# Altium PCB PCB1.PcbDoc
Units mil, origin at the board's own origin, x right, y up, seen from the top; angles counter-clockwise.
Board outline 3905 x 4010 mil, 2 copper layers (Top Layer, Bottom Layer); 16 components, 16 nets, 37 pads, 2 vias.
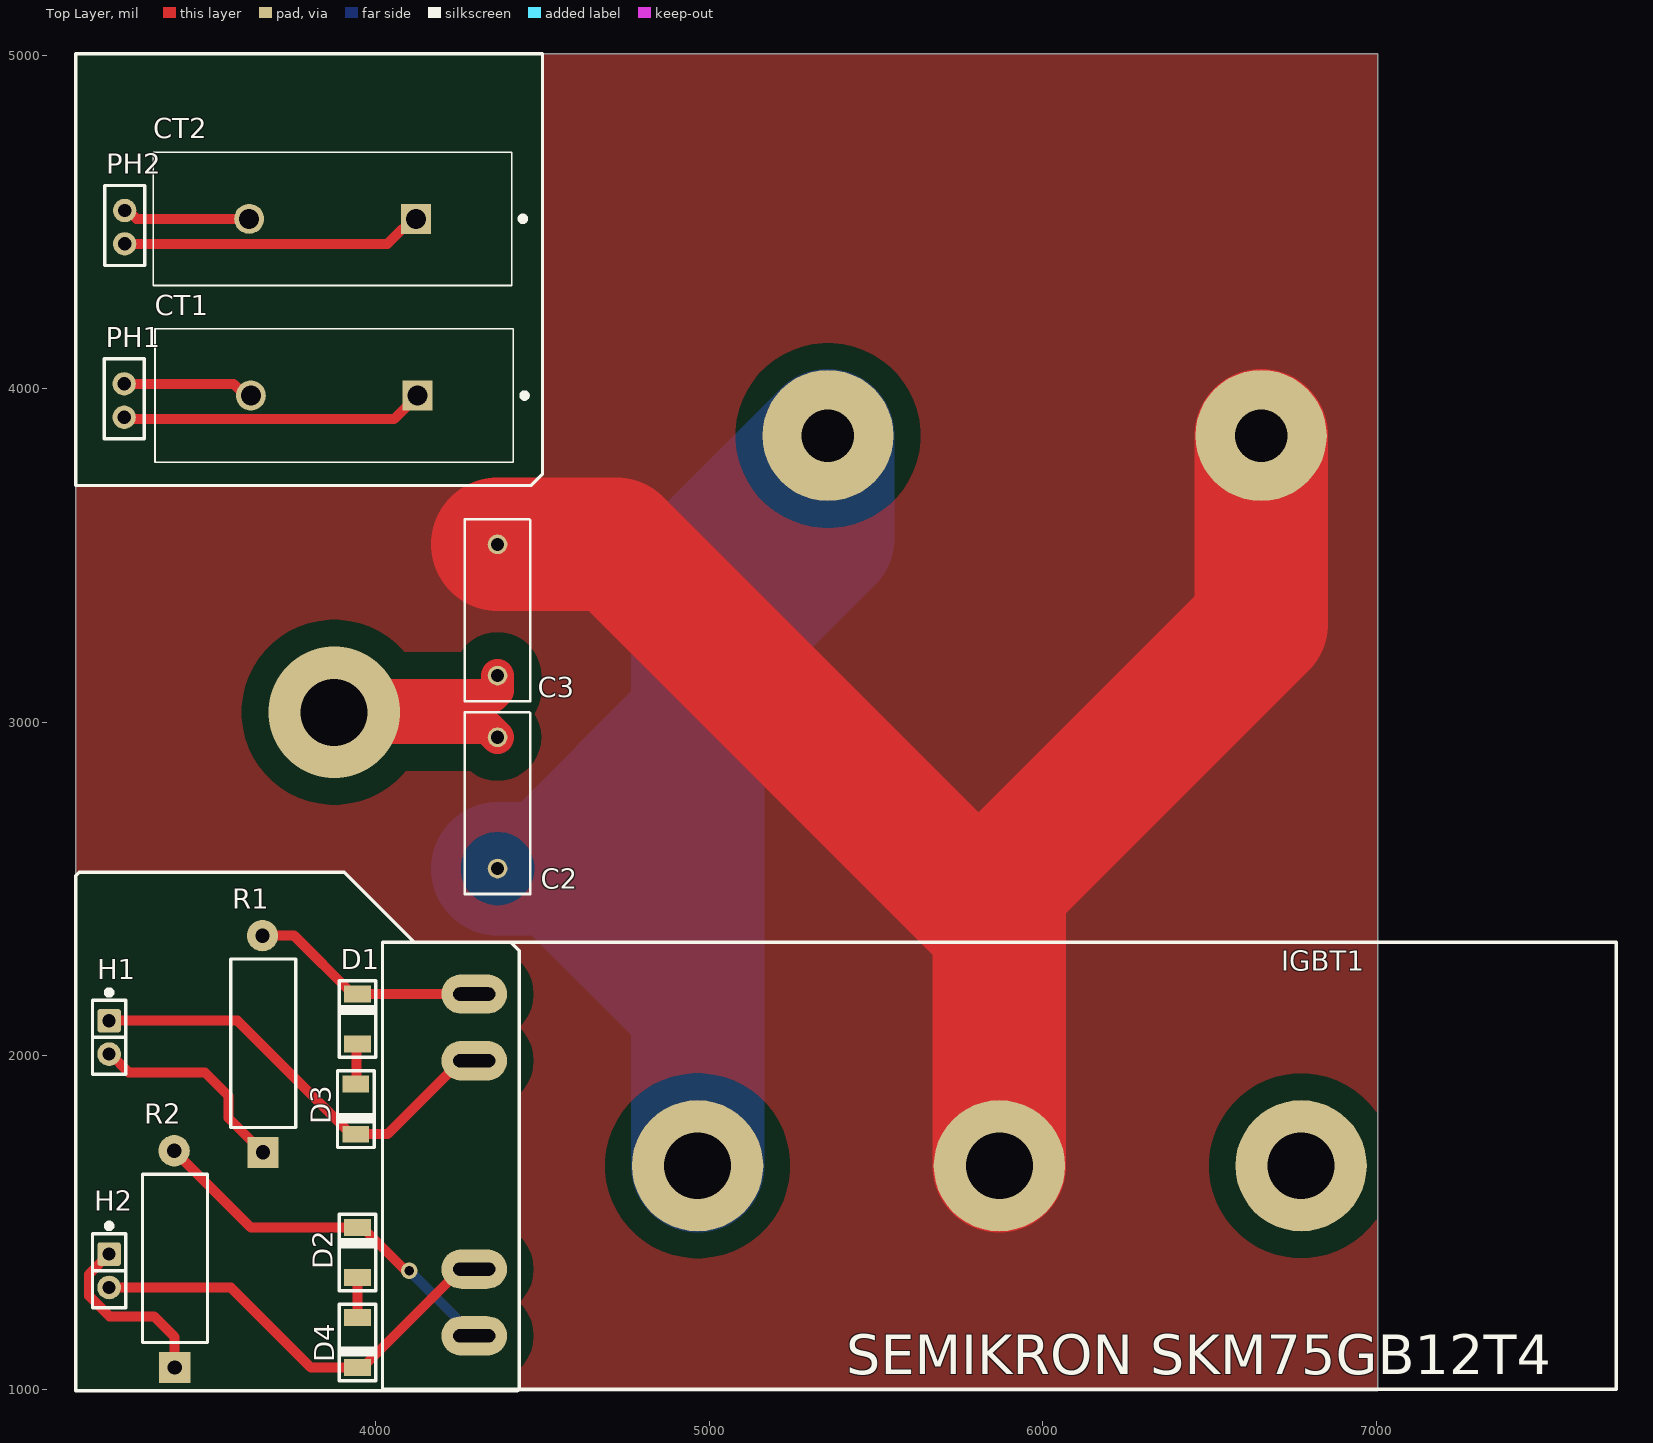
[diagram p0: Top Layer view]
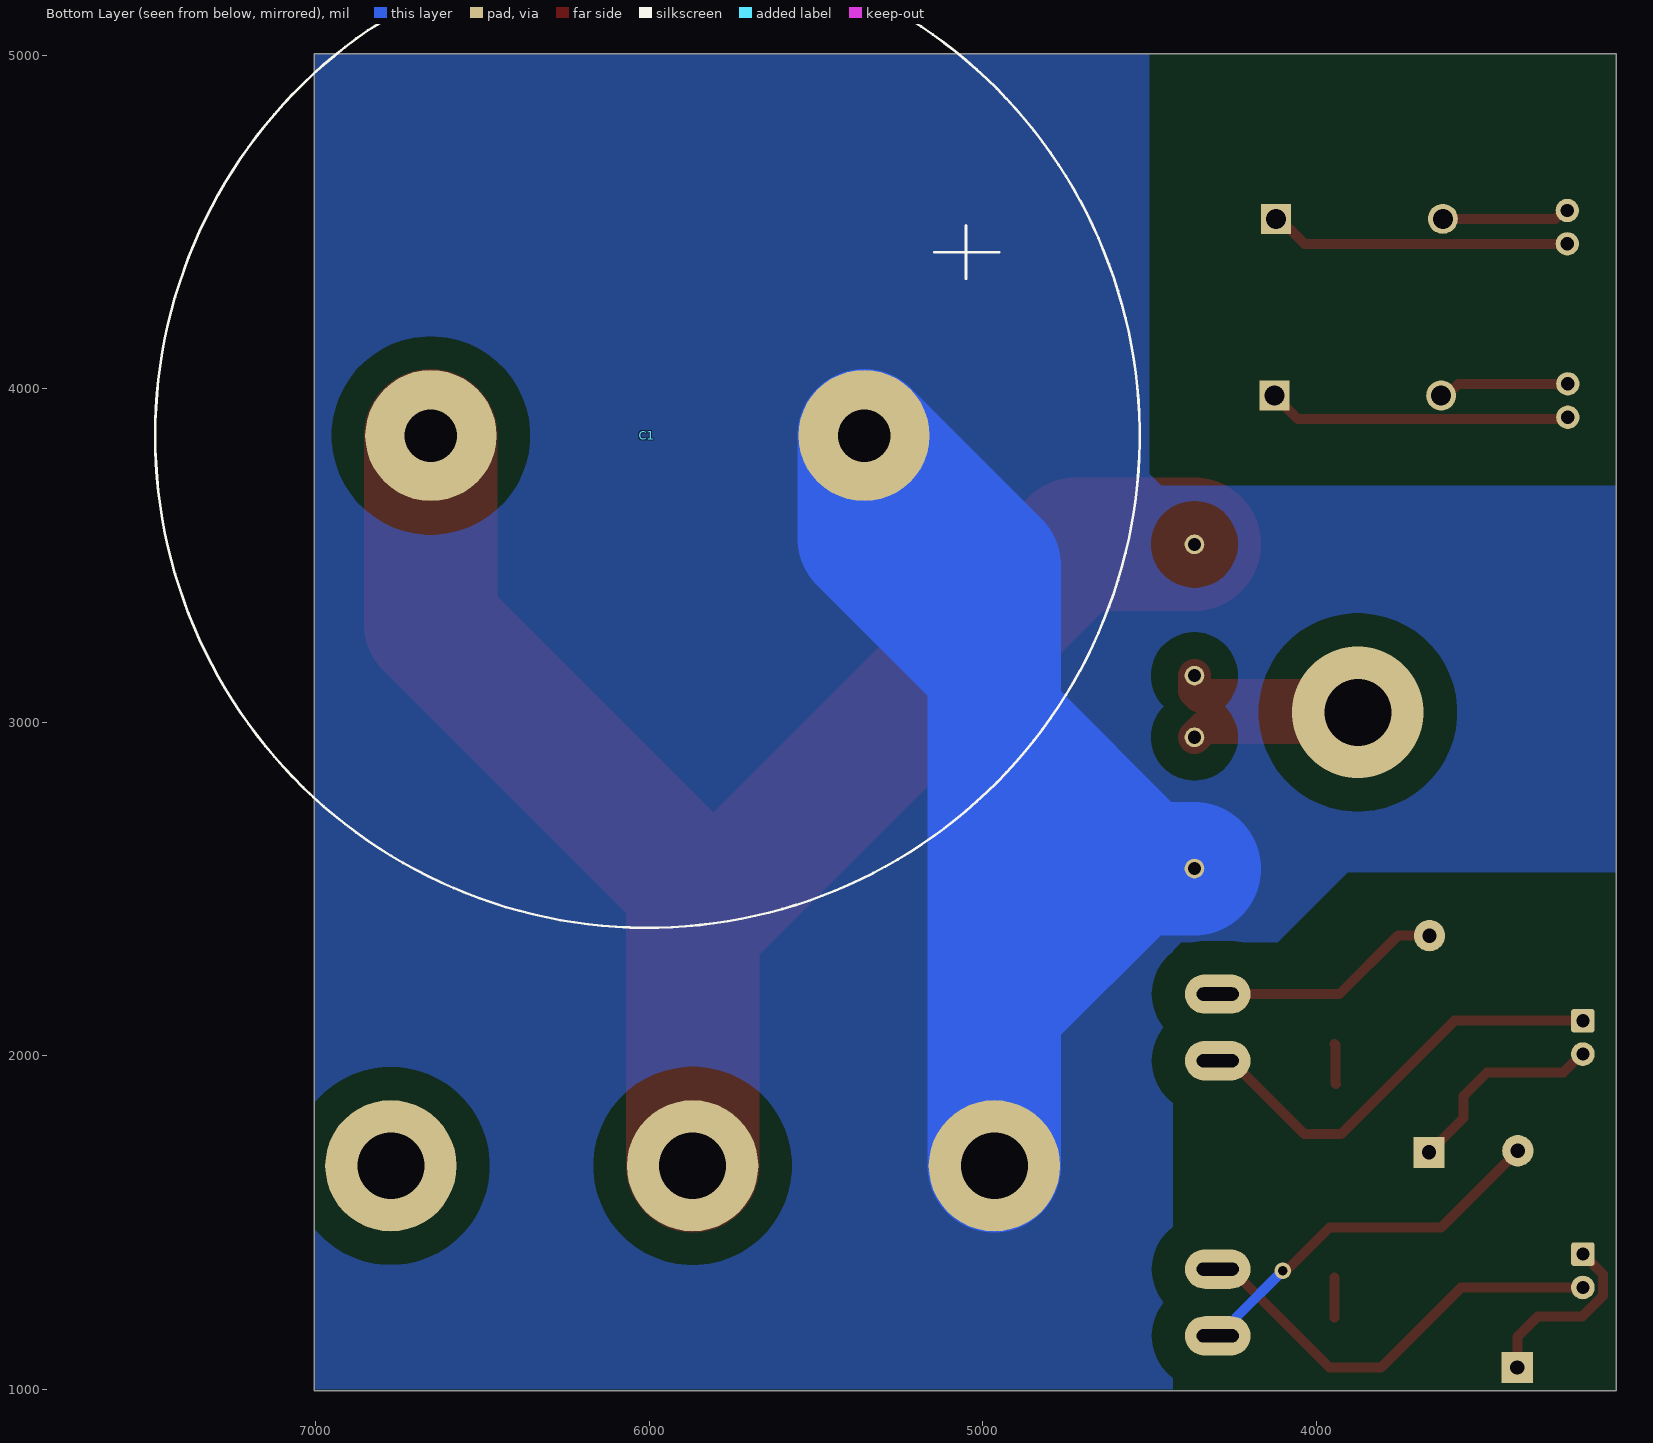
[diagram p1: Bottom Layer view, seen from below]
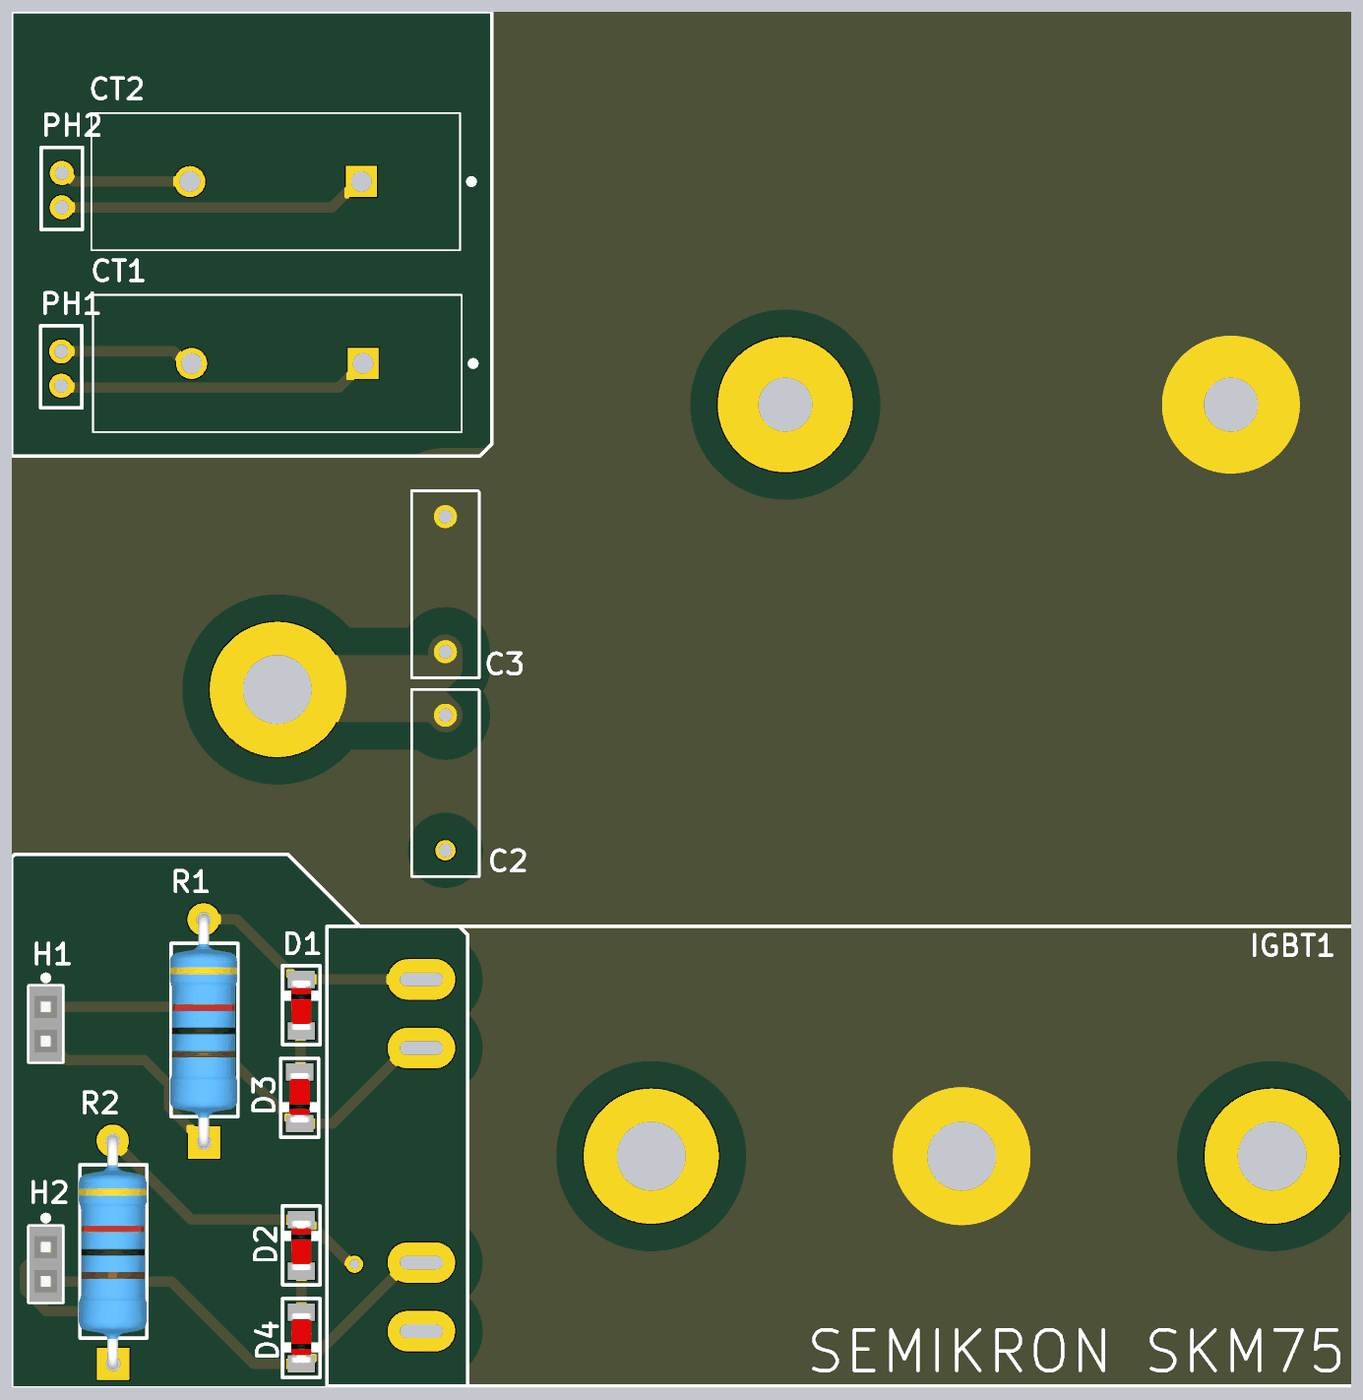
[diagram p2: 3D render of the assembled board from above, using the file's embedded part models]

## Layer stack, top to bottom
Top Solder: solder mask 0.4, Solder Resist, Dk 3.5
Top Layer: signal copper 1.4
Dielectric 1: dielectric 12.6, FR-4, Dk 4.8
Bottom Layer: signal copper 1.4
Bottom Solder: solder mask 0.4, Solder Resist, Dk 3.5

## Board outline
3100,995 7005,995 7005,5005 3100,5005

## Design rules (kind name [scope] priority, off if disabled: settings)
Clearance Clearance_3 [InNamedPolygon('GND_L01_P001')] p1: gap=80 ignorepadtopadclearanceinfootprint=FALSE
Clearance Clearance_2 [InNamedPolygon('VCC_L02_P000')] p2: gap=100 ignorepadtopadclearanceinfootprint=FALSE
Clearance Clearance_1 [InNamedPolygon('GND_L01_P000')] p3: gap=50 ignorepadtopadclearanceinfootprint=FALSE
Clearance [All] p4: gap=10 ignorepadtopadclearanceinfootprint=FALSE
PlaneClearance [All] p1: clearance=10
PlaneConnect [All] p1: planeconnectstyle=Direct reliefexpansion=20 reliefentries=4 reliefconductorwidth=200 reliefairgap=50
PolygonConnect PolygonConnect_3 [All vs IsNamedPolygon('GND_L01_P001')] p1: thpad.connectstyle=Direct thpad.reliefconductorwidth=10 thpad.reliefentries=4 thpad.polygonreliefangle="90 Angle" thpad.airgapwidth=10 smdpad.connectstyle=Relief smdpad.reliefconductorwidth=10 smdpad.reliefentries=4 smdpad.polygonreliefangle="90 Angle" smdpad.airgapwidth=10 via.connectstyle=Relief via.reliefconductorwidth=10 via.reliefentries=4 via.polygonreliefangle="90 Angle" via.airgapwidth=10
PolygonConnect PolygonConnect_2 [All vs IsNamedPolygon('VCC_L02_P000')] p2: thpad.connectstyle=Direct thpad.reliefconductorwidth=10 thpad.reliefentries=4 thpad.polygonreliefangle="90 Angle" thpad.airgapwidth=10 smdpad.connectstyle=Relief smdpad.reliefconductorwidth=10 smdpad.reliefentries=4 smdpad.polygonreliefangle="90 Angle" smdpad.airgapwidth=10 via.connectstyle=Relief via.reliefconductorwidth=10 via.reliefentries=4 via.polygonreliefangle="90 Angle" via.airgapwidth=10
PolygonConnect PolygonConnect_1 [All vs IsNamedPolygon('GND_L01_P000')] p3: thpad.connectstyle=Direct thpad.reliefconductorwidth=10 thpad.reliefentries=4 thpad.polygonreliefangle="90 Angle" thpad.airgapwidth=10 smdpad.connectstyle=Relief smdpad.reliefconductorwidth=10 smdpad.reliefentries=4 smdpad.polygonreliefangle="90 Angle" smdpad.airgapwidth=10 via.connectstyle=Relief via.reliefconductorwidth=10 via.reliefentries=4 via.polygonreliefangle="90 Angle" via.airgapwidth=10
PolygonConnect [All] p4: connectstyle=Relief reliefconductorwidth=10 reliefentries=4 polygonreliefangle="90 Angle" airgapwidth=10
RoutingVias [All] p1: holewidth=28 width=50 viastyle="Through Hole" minholewidth=28 minwidth=50 maxholewidth=28 maxwidth=50
SolderMaskExpansion [All] p1: expansion=4 istentingtop=FALSE
Width [All] p1: maxlimit=10000 minlimit=10 preferedwidth=30 minimp=50.000000 maximp=50.000000 favimp=50.000000
28 further rules are at their usual default settings.

## Components (designator, comment, footprint, x,y, rotation, side; value= is the part's Value field where it differs from the comment)
C1 "Capacitor 4700uF 450V" "Capacitor 4700uF 450V RIFA" 6655,3860 r180 bottom
C2 "Capacitor 100n 250V (Verniz)" "Capacitor 100n (cor verniz)" 4365,2955 r270 top
C3 "Capacitor 100n 250V (Verniz)" "Capacitor 100n (cor verniz)" 4365,3533.7 r270 top
CT1 "CT206-3A" CT206-3A#1 4125,3980 r180 top
CT2 "CT206-3A" CT206-3A#2 4120,4510 r180 top
D1 "V?" SOD-80 3944.99,2110 r90 top
D2 "V?" SOD-80 3944.99,1410 r90 top
D3 "V?" SOD-80 3939.99,1840 r270 top
D4 "V?" SOD-80 3944.99,1140 r270 top
H1 "Q1" "Pin Socket 1x2 TH Pitch 2.54mm" 3200,2105 r270 top
H2 "Q2" "Pin Socket 1x2 TH Pitch 2.54mm" 3200,1405 r270 top
IGBT1 "SKM75GB12T4" "SEMIKRON SKM75GB12T4" 4020,2340 r0 top
PH1 "PinHead2" PinHead2 3245,4015 r270 top
PH2 "PinHead2" PinHead2 3246.66,4535 r270 top
R1 "Valor" RES_AXIAL_1W 3710,1855 r90 top
R2 "Valor" RES_AXIAL_1W 3445,1210 r90 top

## Footprints (in the part's own frame and the unit in brackets; to place one, negate y for a bottom-side part, rotate by r counter-clockwise, add the part's x,y. Pads: shape width x height; smd on the part's side, far side on the other; paste and mask are expansions set on the pad)
"Capacitor 100n (cor verniz)" [mm]
  round 1.5 hole 1: 1(0,0) 2(10,0)
  silkscreen extent -1.91,-2.5 11.94,2.5
"Capacitor 4700uF 450V RIFA" [mm]
  round 10 hole 4: 1(0,0) 2(33,0)
  silkscreen extent -21,-37.5 54,37.5
CT206-3A#1 [mil]
  round 90 hole 60: 2(500,0)
  rect 90x90 hole 60: " "(0,0)
  silkscreen extent -329,-200 788,200
CT206-3A#2 [mil]
  rect 90x90 hole 60: 1(0,0)
  round 90 hole 60: 2(500,0)
  silkscreen extent -329,-200 788,200
"Pin Socket 1x2 TH Pitch 2.54mm" [mm] "PinHeader 1x2 TH Pitch 2.54mm"
  rrect25% 1.8x1.8 hole 1: 1(0,0)
  round 1.8 hole 1: 2(2.54,0)
  silkscreen extent -2.3,-1.27 4.09,1.27, body extent -1.52,-1.21 4.06,1.21, height 8.5
PinHead2 [mil]
  round 70 hole 40: 1(0,0) 2(100,0)
  silkscreen extent -75,-60 165,60
RES_AXIAL_1W [mil]
  rect 93.94x93.94 hole 43.31: 1(-145,48.54)
  round 93.94 hole 43.31: 2(505,50)
  silkscreen extent -70,-50 435,145, body extent -161,-48 521,148, height 201
"SEMIKRON SKM75GB12T4" [mm]
  round 10 hole 5.1: 1(69.977,-17.018) 2(46.99,-17.018) 3(24.003,-17.018)
  rrect100% 5x3 hole 1 slot 3.2 at 0 deg: 4(6.985,-3.937) 5(6.985,-9.017) 6(6.985,-29.972) 7(6.985,-24.892)
  silkscreen extent 0,-34.04 93.98,0
SOD-80 [mil]
  rect 50x80 smd: A(-75,0) K(75,0)
  silkscreen extent -115,-55 115,55, body extent -73,-31 73,31, height 64

## Part data
CT1 CT2: "PTH Current Transformer"
D1 D2 D3 D4: library part Zener, "Diodo zener"
H1 H2: library part HEADER_SOCKET_2, "Socket to header connector with 2 pins"
R1 R2: library part Resistor, "Resistor"

## Via types
v1: diameter 50, hole 28, Top Layer to Bottom Layer, 1 vias
v2: diameter 393.7, hole 200.79, Top Layer to Bottom Layer, 1 vias

## Nets (pads, with @x,y where several pads share a name; then routed paths per layer and width w, separated by ;. In a path a pad name is that pad's centre, name@x,y a point inside that pad or via, vN(x,y) a via of type N, cw(c..) or ccw(c..) an arc to the next point about the centre after c; other vN are vias at no path point)
"Bridge A": IGBT1.1
"Bridge B": C2.1 C3.2 | length 1083
  Top Layer w100: C2.1 4335,2985 3920,2985 v2(3875,3030) 3920,3030 3970,3080 4350,3080 4365,3095 C3.2
"Gate A": D1.K IGBT1.4 R1.2 | length 707.5
  Top Layer w30: R1.2 3754.99,2360 3929.99,2185 D1.K IGBT1.4
"Gate B": D2.K IGBT1.6 R2.2 | length 1139
  Top Layer w30: R2.2 3625,1485 D2.K 3959.99,1485 4086.16,1358.83 4096.17,1358.83 v1(4100,1355)
  Bottom Layer w30: v1(4100,1355) 4238.77,1216.23 4238.77,1200.7 4279.47,1160 IGBT1.6
GND: C1.1 C3.1 IGBT1.2 | length 4496
  Top Layer w400: C3.1 4721.3,3533.7 5870,2385 ; IGBT1.2 5870,2385 ; C1.1 6655,3295 5870,2510 5870,2385
NetCT1_1: "CT1. " PH1.2 | length 911.1
  Top Layer w30: PH1.2 3250,3910 4055,3910 4125,3980
NetCT1_2: CT1.2 PH1.1 | length 394.5
  Top Layer w30: PH1.1 3573.76,4015 3608.76,3980 CT1.2
NetCT2_1: CT2.1 PH2.2 | length 904.4
  Top Layer w30: PH2.2 4035,4435 4080,4480 4090,4480 CT2.1
NetCT2_2: CT2.2 PH2.1 | length 383.7
  Top Layer w30: PH2.1 3257.49,4535 3282.49,4510 CT2.2
NetD1_A: D1.A D3.A | length 122.1
  Top Layer w30: D3.A 3942.49,1917.5 3942.49,2032.5 D1.A
NetD2_A: D2.A D4.A | length 120
  Top Layer w30: D4.A D2.A
Q1+: H1.2 R1.1 | length 622.3
  Top Layer w30: H1.2 3203.75,2005 3258.75,1950 3487.43,1950 3558.46,1878.97 3558.46,1813 R1.1
Q1-: D3.K H1.1 IGBT1.5 | length 1327
  Top Layer w30: H1.1 3584.99,2105 3924.99,1765 D3.K 4035.63,1765 4255.63,1985 IGBT1.5
Q2+: D4.K H2.2 IGBT1.7 | length 1316.6
  Top Layer w30: H2.2 3565,1305 3805,1065 D4.K 3959.99,1065 4254.99,1360 IGBT1.7
Q2-: H2.1 R2.1 | length 549.9
  Top Layer w30: H2.1 3139.57,1344.57 3139.57,1279.97 3201.07,1218.47 3334.96,1218.47 3396.46,1156.97 R2.1
VCC: C1.2 C2.2 IGBT1.3 | length 4770.7
  Bottom Layer w400: IGBT1.3 4965,2145 ; 4965,3010 4516.3,2561.3 C2.2 4548.7,2561.3 4965,2145 ; 4965,2145 4965,3161.3 ; 4965,3161.3 4965,3469.21 C1.2 5355.79,3552.09 4965,3161.3

## Polygon pours and split planes (outlines as drawn)
VCC on Bottom Layer "VCC_L02_P000" (solid, remove dead copper, pour order 0): 3100,2550 3100,3710 4465,3710 4500,3745 4500,5005 7005,5005 7005,995 7000,1000 4430,1000 4430,2315 4405,2340 4115,2340 3905,2550
GND on Top Layer "GND_L01_P001" (solid, remove dead copper, pour order 1): 3100,2550 3100,3710 4460,3710 4495,3745 4500,3745 4500,5005 7005,5005 7005,995 7000,1000 4430,1000 4430,2315 4405,2340 4115,2340 3905,2550 3115,2550

## Silkscreen, mask and mechanical layers (free items; w line width, h text height)
Top Overlay:
  lines w10: 4515,1000 4430,1000 ; 4430,1000 4425,995 3100,995 3100,2540 3110,2550 3905,2550 4115,2340 4405,2340 4430,2315 4430,1000 ; 3100,3710 3100,5005 4500,5005 4500,3745 4465,3710 3100,3710

## Text inside footprints (layer, text, board x,y; h text height)
IGBT1: Top Overlay "SEMIKRON SKM75GB12T4" at 5410,1045 h118.11